# Altium PCB USBgpib-V3-USBTMC.PcbDoc
Units mm, origin at the board's own origin, x right, y up, seen from the top; angles counter-clockwise.
Board outline 54.72 x 15.3 mm, 4 copper layers (Top Layer, Layer 1, Layer 2, Bottom Layer), stack 1.584 mm thick; 33 components, 37 nets, 161 pads, 76 vias.
Unrouted connection lines stored in the file: 2.
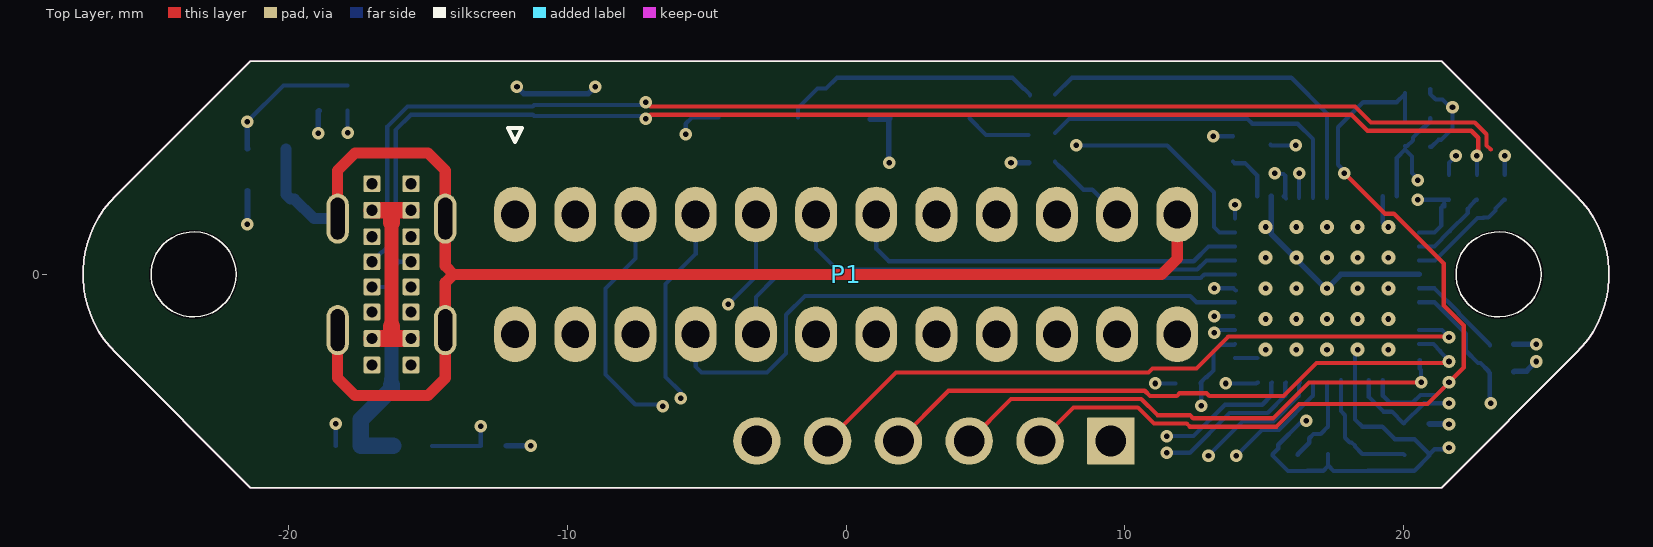
[diagram p0: Top Layer view]
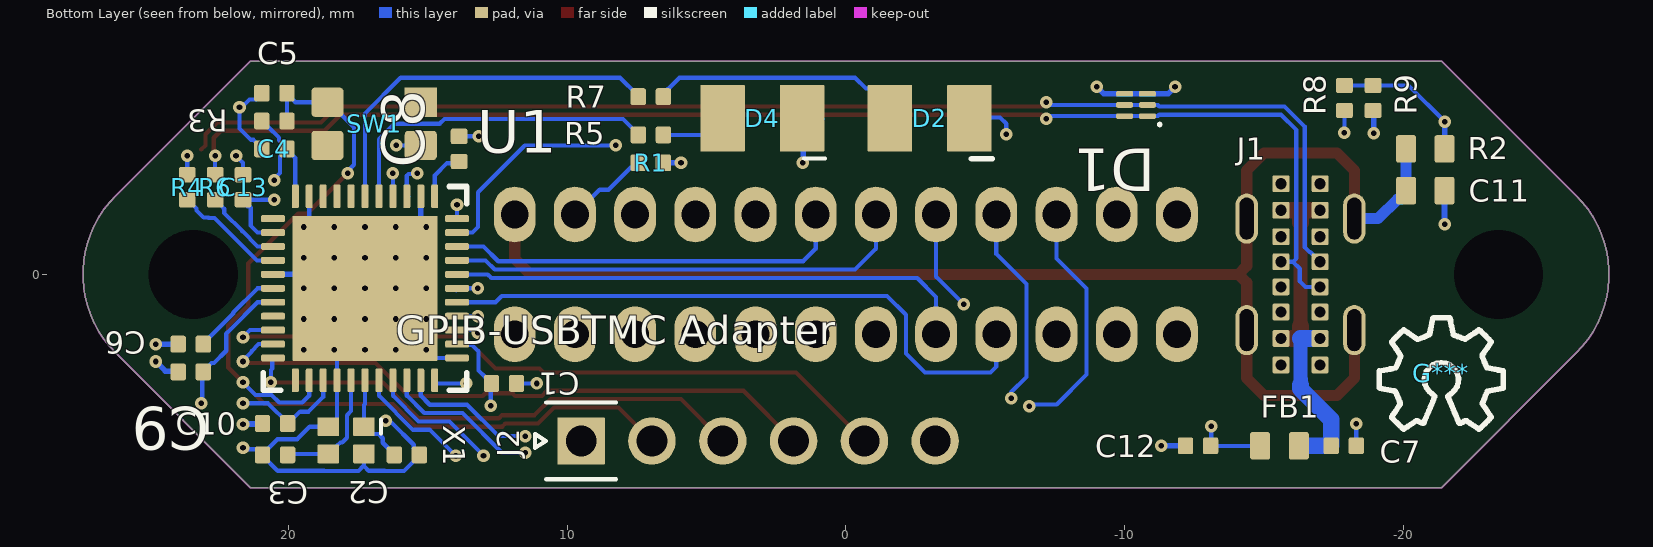
[diagram p1: Bottom Layer view, seen from below]
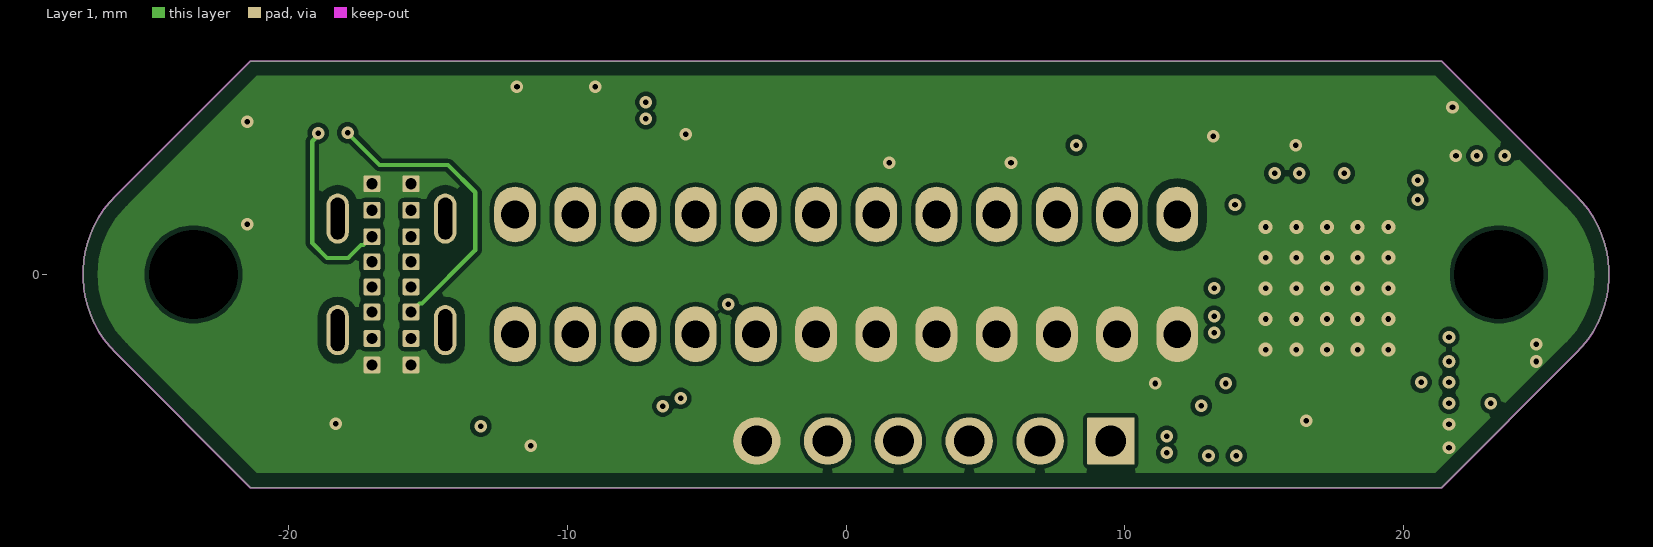
[diagram p2: Layer 1]
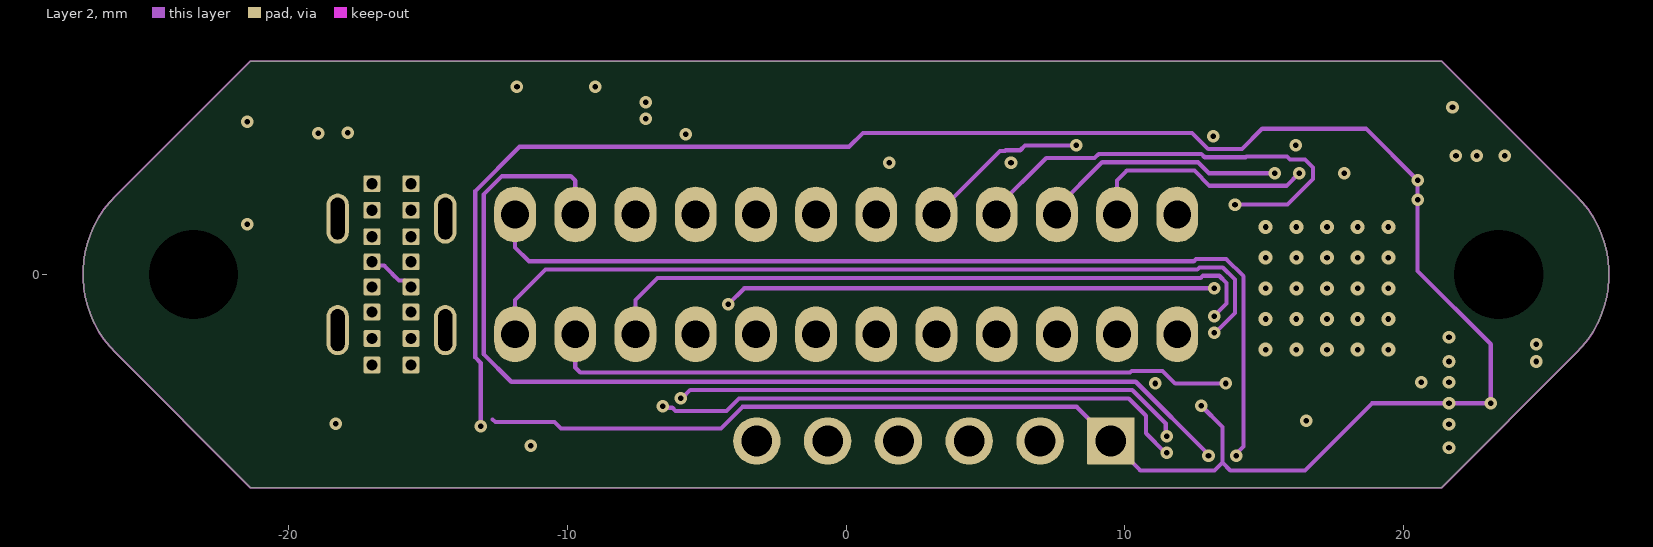
[diagram p3: Layer 2]
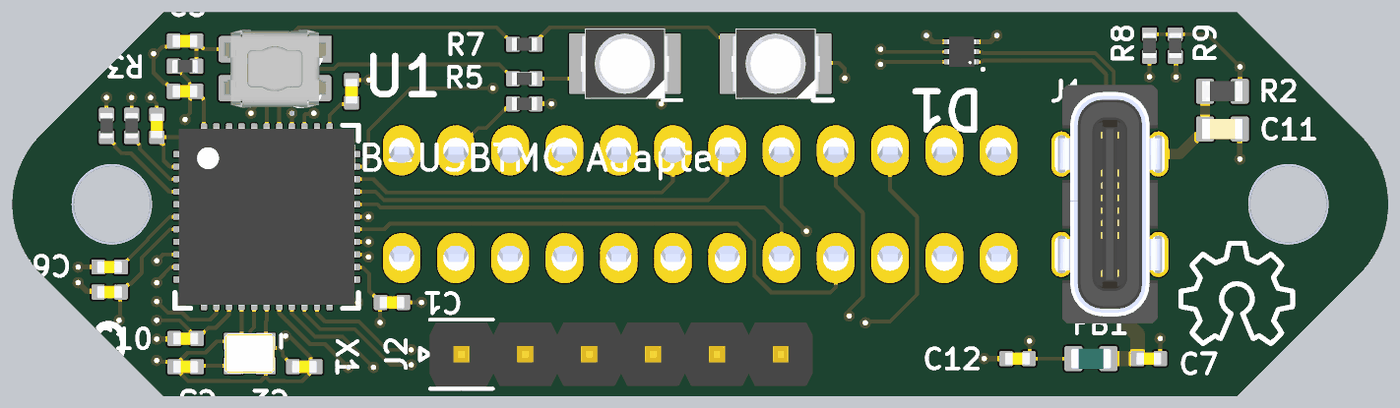
[diagram p4: 3D render of the assembled board from below, using the file's embedded part models]

## Layer stack, top to bottom
Top Solder: solder mask 0.0102, Solder Resist, Dk 3.5
Top Layer: signal copper 0.0356
Dielectric 2: prepreg 0.0711, PP-006, Dk 4.1
Layer 1: signal copper 0.035
Dielectric 1: dielectric 1.3, FR-4, Dk 4.8
Layer 2: signal copper 0.0356
Dielectric 3: prepreg 0.0711, PP-006, Dk 4.1
Bottom Layer: signal copper 0.0356
Bottom Solder: solder mask 0.0102, Solder Resist, Dk 3.5

## Board outline
-21.357,-7.65 -26.178,-2.828 cw(c-23.4,0) -26.178,2.828 -21.357,7.65 21.357,7.65 26.178,2.828 cw(c23.4,0) 26.178,-2.828 21.357,-7.65

## Design rules (kind name [scope] priority, off if disabled: settings)
Clearance Clearance_2 [InNet('SHIELD')] p1: gap=0.25 ignorepadtopadclearanceinfootprint=FALSE
Clearance Clearance_1 [All vs IsKeepOut] p2: gap=0.5 ignorepadtopadclearanceinfootprint=FALSE
Clearance [All] p3: gap=0.15 ignorepadtopadclearanceinfootprint=FALSE
HoleSize [All] p1: absolutevalues=TRUE maxlimit=10 minlimit=0.025 maxpercent=80.000 minpercent=20.000
MinimumSolderMaskSliver [All] p1: minsoldermaskwidth=0.075
PolygonConnect [All] p1: connectstyle=Direct reliefconductorwidth=0.254 reliefentries=4 polygonreliefangle="90 Angle" airgapwidth=0.254
RoutingVias [All] p1: holewidth=0.2 width=0.45 viastyle="Through Hole" minholewidth=0.2 minwidth=0.45 maxholewidth=0.5 maxwidth=1
SilkToSilkClearance [All] p1: silktosilkclearance=0.15
SilkToSolderMaskClearance [IsPad] p1: minsilkscreentomaskgap=0.1 clearancetoexposedcopper=TRUE
SolderMaskExpansion [All] p1: expansion=0.102 istentingtop=FALSE
SupplyNets "Schematic Supply Nets_4" [InNet('5VP')] p1: voltage=0.000
SupplyNets "Schematic Supply Nets_3" [InNet('SHIELD')] p2: voltage=0.000
SupplyNets "Schematic Supply Nets_2" [InNet('VBUS')] p3: voltage=0.000
SupplyNets "Schematic Supply Nets" [InNet('GND')] p4: voltage=0.000
Width [All] p1: maxlimit=10 minlimit=0.15 preferedwidth=0.15
26 further rules are at their usual default settings.

## Components (designator, comment, footprint, x,y, rotation, side; value= is the part's Value field where it differs from the comment)
C1 "CAP0402" CAPC0402 12.264,-3.912 r180 bottom
C2 "CAP0603" CAPC0402 15.75,-6.475 r180 bottom
C3 "CAP0603" CAPC0402 20.475,-6.475 r0 bottom
C4 "CAP0402" CAPC0402 20.5,4.5 r0 bottom locked
C5 "CAP0402" CAPC0402 20.5,6.5 r0 bottom locked
C6 "CAP0402" CAPC0402 23.5,-2.5 r0 bottom locked
C7 "CAP0402" CAPC0402 -17.85,-6.15 r180 bottom
C8 "CAP0402" CAPC0402 13.875,4.5 r90 bottom locked
C9 "CAP0402" CAPC0402 23.5,-3.5 r0 bottom locked
C10 "CAP0402" CAPC0402 20.475,-5.35 r0 bottom
C11 "CAP0603" CAPC0603 -20.775,3 r180 bottom
C12 "CAP0402" CAPC0402 -12.625,-6.15 r0 bottom
C13 "CAP0402" CAPC0402 21.625,3.125 r90 bottom locked
D1 "CDDFN6-3312P" SON40P100X50-6L -10.4,6.075 r0 bottom
D2 "LED-PLCC2-GREEN" LED-PLCC2-GREEN -3,5.6 r0 bottom locked
D4 "LED-PLCC2-BLUE" LED-PLCC2-BLUE 3,5.6 r0 bottom locked
FB1 "FB0603" FB0603 -15.55,-6.15 r0 bottom value=1KZ
G*** "Comment" LOGO -21.35,-3.55 r180 bottom value=LOGO
J1 "CONN-USBC-USB2-VERT" CONN-CUI-UJ20-C-V-C-3-SMT-TR -16.3,0 r90 bottom locked
J2 "CONN-HEADER-PIN-1X6" HEADER-1X6 3.15,-5.975 r180 bottom
P1 "CONN-NORCOMP-111-024-113R00" CONN-NORCOMP-111-024-113L001 0.006,0 r180 top locked
R1 "RESC0402" RESC0402 7,4 r180 bottom locked value=100K
R2 "RESC0603" RESC0603 -20.775,4.5 r180 bottom value=4K7
R3 "RESC0402" RESC0402 20.5,5.5 r180 bottom locked value=10K
R4 "RESC0402" RESC0402 23.625,3.125 r270 bottom locked value=27R
R5 "RESC0402" RESC0402 7,5 r180 bottom locked value=1K
R6 "RESC0402" RESC0402 22.625,3.125 r270 bottom locked value=27R
R7 "RESC0402" RESC0402 7,6.375 r180 bottom locked value=1K
R8 "RESC0402" RESC0402 -17.875,6.325 r90 bottom value=5K1
R9 "RESC0402" RESC0402 -18.9,6.325 r90 bottom value=5K1
SW1 "SWITCH-PANASONIC-EVP-AA202K" SWITCH-PANASONIC-EVP-AA202K 16.925,5.4 r0 bottom locked
U1 "ATMEGA32U4QFN" QFN50P700X700X-44-TH520X520 17.25,-0.5 r180 bottom locked
X1 "16MHz" XOSC-YXC-2016 17.925,-5.95 r0 bottom

## Footprints (in the part's own frame and the unit in brackets; to place one, negate y for a bottom-side part, rotate by r counter-clockwise, add the part's x,y. Pads: shape width x height; smd on the part's side, far side on the other; paste and mask are expansions set on the pad)
CAPC0402 [mm] "CAPACITOR, CHIP 0402 (1005) 0.5MM THICK"
  rrect25% 0.55x0.6 smd paste+0 mask+0.075: 1(-0.45,0) 2(0.45,0)
  body extent -0.51,-0.25 0.51,0.26, height 0.52
CAPC0603 [mm] "CAPACITOR, CHIP 0603 (1608) 0.5MM THICK"
  rrect25% 0.72x0.99 smd paste+0 mask+0.075: 1(-0.69,0) 2(0.69,0)
  body extent -0.81,-0.41 0.81,0.41, height 0.51
CONN-CUI-UJ20-C-V-C-3-SMT-TR [mm]
  oval 1.8x0.8 hole 0.5 slot 1.5 at 0 deg paste-2539.97 mask+0.05: 1(-2,1.93) 2(2,1.93) 3(2,-1.93) 4(-2,-1.93)
  rrect16% 0.6x0.6 hole 0.4 paste-2539.97 mask+0.05: A1(-3.25,0.7) A4(-2.3,0.7) A5(-1.35,0.7) A6(-0.45,0.7) A7(0.45,0.7) A8(1.35,0.7) A9(2.3,0.7) A12(3.25,0.7) B1(3.25,-0.7) B4(2.3,-0.7) B5(1.35,-0.7) B6(0.45,-0.7) B7(-0.45,-0.7) B8(-1.35,-0.7) B9(-2.3,-0.7) B12(-3.25,-0.7)
  body extent -4.75,-2.08 4.75,2.08, height 10.5
CONN-NORCOMP-111-024-113L001 [mm] "GPIB MALE VERT"
  oval 1.5x2 hole 1 paste-2539.97 mask+0.05: 1(11.874,-2.146) 2(9.716,-2.146) 3(7.556,-2.146) 4(5.397,-2.146) 5(3.239,-2.146) 6(1.08,-2.146) 7(-1.079,-2.146) 8(-3.238,-2.146) 9(-5.397,-2.146) 10(-7.556,-2.146) 11(-9.716,-2.146) 12(-11.874,-2.146) 13(11.874,2.146) 14(9.716,2.146) 15(7.556,2.146) 16(5.397,2.146) 17(3.238,2.146) 18(1.079,2.146) 19(-1.08,2.146) 20(-3.239,2.146) 21(-5.397,2.146) 22(-7.556,2.146) 23(-9.716,2.146) 24(-11.874,2.146)
  round 0 hole 3.2 unplated paste-2539.97 mask+0.15: ME1(23.406,0) ME2(-23.406,0)
  silkscreen extent 11.63,-5.25 12.12,-4.75, body extent -27.32,-7.65 27.33,7.65, height 14.81
FB0603 [mm] "FERRITE BEAD 0603 (1608)"
  rrect25% 0.72x0.99 smd mask+0.075: 1(-0.69,0) 2(0.7,0)
  body extent -0.8,-0.4 0.8,0.4, height 0.95
HEADER-1X6 [mm]
  rrect5% 1.7x1.7 hole 1.1 mask+0.05: 1(-6.35,0)
  round 1.7 hole 1.1 mask+0.05: 2(-3.81,0) 3(-1.27,0) 4(1.27,0) 5(3.81,0) 6(6.35,0)
  silkscreen extent -8,-1.38 -5.1,1.38, body extent -7.62,-1.27 7.62,1.27, height 8.55
LED-PLCC2-BLUE [mm] "SMD Mono-color TOP LED, body 3.2x2.8mm"
  rrect6% 1.6x2.4 smd mask+0.05: 1(-1.425,0) 2(1.425,0)
  silkscreen extent -2.25,1.45 -1.5,1.45, body extent -1.75,-1.4 1.75,1.4, height 1.9
LED-PLCC2-GREEN [mm] "SMD Mono-color TOP LED, body 3.2x2.8mm"
  rrect6% 1.6x2.4 smd mask+0.05: 1(-1.425,0) 2(1.425,0)
  silkscreen extent -2.25,1.45 -1.5,1.45, body extent -1.75,-1.4 1.75,1.4, height 1.9
LOGO [mm]
  silkscreen extent -2.23,-2 2.23,2
QFN50P700X700X-44-TH520X520 [mm] "QFN, 44-Leads, Body 7.00x7.00mm, Pitch 0.50mm, Thermal Pad 5.20x5.20mm, IPC High Density"
  rrect40% 0.85x0.25 smd mask+0.05: 1(-3.3,2.5) 2(-3.3,2) 3(-3.3,1.5) 4(-3.3,1) 5(-3.3,0.5) 6(-3.3,0) 7(-3.3,-0.5) 8(-3.3,-1) 9(-3.3,-1.5) 10(-3.3,-2) 11(-3.3,-2.5) 23(3.3,-2.5) 24(3.3,-2) 25(3.3,-1.5) 26(3.3,-1) 27(3.3,-0.5) 28(3.3,0) 29(3.3,0.5) 30(3.3,1) 31(3.3,1.5) 32(3.3,2) 33(3.3,2.5)
  rrect40% 0.25x0.85 smd mask+0.05: 12(-2.5,-3.3) 13(-2,-3.3) 14(-1.5,-3.3) 15(-1,-3.3) 16(-0.5,-3.3) 17(0,-3.3) 18(0.5,-3.3) 19(1,-3.3) 20(1.5,-3.3) 21(2,-3.3) 22(2.5,-3.3) 34(2.5,3.3) 35(2,3.3) 36(1.5,3.3) 37(1,3.3) 38(0.5,3.3) 39(0,3.3) 40(-0.5,3.3) 41(-1,3.3) 42(-1.5,3.3) 43(-2,3.3) 44(-2.5,3.3)
  rrect1% 5.2x5.2 smd mask+0.05: 45(0,0)
  silkscreen extent -3.65,-3.65 3.65,3.65, body extent -3.52,-3.52 3.52,3.52, height 1
RESC0402 [mm] "RESISTOR, CHIP 0402 (1005)"
  rrect25% 0.55x0.6 smd paste+0 mask+0.075: 1(-0.45,0) 2(0.45,0)
  body extent -0.5,-0.25 0.5,0.25, height 0.27
RESC0603 [mm] "RESISTOR, CHIP 0603 (1608)"
  rrect25% 0.72x0.99 smd paste+0 mask+0.075: 1(-0.69,0) 2(0.69,0)
  body extent -0.8,-0.4 0.8,0.4, height 0.37
SON40P100X50-6L [mm] "SON, 6-Leads, Body 1.20x1.00mm, Pitch 0.40mm, IPC High Density"
  rrect50% 0.6x0.2 smd mask+0.05: 1(-0.41,0.4) 2(-0.41,0) 3(-0.41,-0.4) 4(0.41,-0.4) 5(0.41,0) 6(0.41,0.4)
  silkscreen extent -0.9,0.65 -0.8,0.75, body extent -0.55,-0.6 0.55,0.6, height 0.5
SWITCH-PANASONIC-EVP-AA202K [mm] "SWITCH-PANASONIC-EVP-AA202K"
  rect 1.15x1.05 smd mask+0.075: 1(-1.675,-0.775)
  rrect25% 1.15x1.05 smd mask+0.075: 2(1.675,-0.775) 3(1.675,0.775) 4(-1.675,0.775)
  body extent -2.15,-1.55 2.15,1.55, height 1.71
XOSC-YXC-2016 [mm] "YSO110TR"
  rrect10% 0.775x0.675 smd paste+0 mask+0.05: 1(-0.637,-0.487) 2(0.637,-0.487) 3(0.637,0.488) 4(-0.637,0.487)
  silkscreen extent -1.25,-0.75 -1.25,-0.24, body extent -1,-0.8 1,0.8, height 0.76

## Part data
C1 C4 C5 C10: library part CAPC-0402-100nF-16V-X7R, "CAPACITOR,CERAMIC,100nF,16V,X7R,0402", Capacitance=100nF, Dielectric=X7R, LCSC=C60474, Package / Case=0402, Supplier Part Number 1=1292-1630-1-ND, Voltage=16V, Supplier 1=Digikey
C2 C3: library part CAPC-0402-15PF-50V-C0G, "CAPACITOR,CERAMIC,15pF,50V,C0G,0402", Capacitance=15pF, Dielectric=C0G, LCSC=C3906764, Package / Case=0402, Supplier Part Number 1=311-3780-1-ND, Voltage=50V, Supplier 1=Digikey
C6: library part CAPC-0402-1u-10V-X7R, "CAPACITOR,CERAMIC,1uF,10V,X7R,0402", Capacitance=1uF, Dielectric=X7R, LCSC=C528974, Package / Case=0603, Supplier Part Number 1=81-GRM155Z71A105KE1D, Voltage=10V, Supplier 1=Mouser
C7 C8 C9 C12 C13: library part CAPC-0402-4u7-10V-X5R, "CAPACITOR,CERAMIC,4u7,10V,X5R,0402", Capacitance=4u7, Dielectric=X5R, LCSC=C1705, Package / Case=0603, Supplier Part Number 1=1276-1482-1-ND, Voltage=10V, Supplier 1=Digikey
C11: library part CAPC-0603-1nF-250V-X7R, "CAPACITOR,CERAMIC,1nF,250V,X7R,0603", Capacitance=1nF, Dielectric=X7R, LCSC=C277510, Package / Case=0603, Supplier Part Number 1=311-4104-1-ND, Voltage=250V, Supplier 1=Digikey
D1: library part TVS-BOURNS-CDDFN6-3312P, LCSC=C3700524
FB1: library part FB0603-1KZ-0R2, LCSC=C160982, Supplier Part Number 1=BLM18KG102SN1D, Supplier 1="Arrow Electronics"
G***: library part LOGO, "OSHW LOGO"
J1: "USB-C, VERTICAL"
P1: "GPIB MALE", Supplier Part Number 1=1024RMA-ND, Supplier 1=Digikey
R1: library part RESC-0402-100K-1%-1/10W, "RESISTOR,100K,1%,63mW,0402 (1005)", LCSC=C60491, Power=1/16W, Supplier Part Number 1=3068008, Tolerance=1%, Supplier 1="Future Electronics"
R2: library part RESC-0603-4K7-1%-1/10W, "RESISTOR,4K7,1%,100mW,0603 (1608)", Power=1/10W, Supplier Part Number 1=5489695, Tolerance=1%, Supplier 1="Future Electronics", Supplier 2=Digikey, Supplier 3=Digikey, Supplier 4=Avnet, Supplier Part Number 2=P4.70KHCT-ND, Supplier Part Number 3=RMCF0603FT4K70CT-ND, Supplier Part Number 4=1622960-1
R3: library part RESC-0402-10K-1%-1/10W, "RESISTOR,10K,1%,63mW,0402 (1005)", LCSC=C60490, Power=1/16W, Supplier Part Number 1=3388022, Tolerance=1%, Supplier 1="Future Electronics"
R4 R6: library part RESC-0402-27R-1%-1/10W, "RESISTOR,27R,1%,63mW,0402 (1005)", LCSC=C138021, Power=1/16W, Supplier Part Number 1=2577120, Tolerance=1%, Supplier 1="Future Electronics"
R5 R7: library part RESC-0402-1K-1%-1/10W, "RESISTOR,1K,1%,63mW,0402 (1005)", LCSC=C106235, Power=1/16W, Supplier Part Number 1=7825607, Tolerance=1%, Supplier 1="Future Electronics"
R8 R9: library part RESC-0402-5K1-1%-1/10W, "RESISTOR,5K1,1%,63mW,0402 (1005)", LCSC=C105872, Power=1/16W, Supplier Part Number 1=6053649, Tolerance=1%, Supplier 1="Future Electronics"
U1: library part IC-ATMEL-ATMEGA32U4-QFN
X1: library part XTAL-YXC-XL7EL89COI-111YLC-16M, "XTAL,4PIN", LCSC=C2965579, Frequency=16MHz

## Via types
v1: diameter 0.45, hole 0.2, Top Layer to Bottom Layer, tented both sides, 51 vias
v2: diameter 0.5, hole 0.2, Top Layer to Bottom Layer, 25 vias

## Nets (pads, with @x,y where several pads share a name; then routed paths per layer and width w, separated by ;. In a path a pad name is that pad's centre, name@x,y a point inside that pad or via, vN(x,y) a via of type N, cw(c..) or ccw(c..) an arc to the next point about the centre after c; other vN are vias at no path point)
5VP: C1.1 C4.1 C8.1 C9.1 C10.1 C12.1 C13.1 FB1.2 J2.1 R3.1 U1.2 U1.7 U1.14 U1.24 U1.34 U1.44 | length 118.4
  Layer 2 w0.15: v1(-13.1,-5.45) -13.1,-3.18 -13.293,-2.987 -13.293,2.987 -11.705,4.575 0.104,4.575 0.604,5.075 12.414,5.075 12.989,4.5 14.204,4.5 14.929,5.225 18.65,5.225 v1(20.5,3.375) v1(20.5,2.675) 20.5,0.119 23.125,-2.506 v1(23.125,-4.625) v1(21.625,-4.625) 18.865,-4.625 16.459,-7.03 13.78,-7.03 13.5,-6.75 ; -12.675,-5.2 -12.575,-5.3 -10.45,-5.3 -10.225,-5.525 -4.482,-5.525 -3.707,-4.75 8.275,-4.75 10.555,-7.03 13.22,-7.03 13.5,-6.75 ; v1(12.739,-4.713) 13.5,-5.474 13.5,-6.75
  Bottom Layer w0.15: FB1.2 -13.1,-6.15 v1(-13.1,-5.45) ; C1.1 12.714,-3.888 12.914,-3.688 12.939,-3.688 13.176,-3.45 13.176,-2.76 13.41,-2.526 13.924,-2.526 U1.24 ; v1@12.739,-4.7 C1.1@12.739,-3.9 ; C8.1 13.937,3.988 14.312,3.988 14.75,3.55 U1.34 ; U1.14 18.75,-4.401 19.274,-4.925 19.574,-4.925 19.999,-5.351 20.725,-4.625 v1(21.625,-4.625) ; U1.44 19.75,4.175 C4.1@20.05,4.475 ; C4.1 C4.1@20.05,4.475 ; C4.1@20.05,4.6 20.125,4.6 20.332,4.807 20.332,4.902 20.706,5.275 20.75,5.275 20.95,5.475 R3.1@20.95,5.6 ; v1(20.5,2.675) C13.1 ; v1(20.5,3.375) 20.5,3.438 20.3,3.638 20.3,4.225 C4.1@20.05,4.475 ; U1.7 21.101,-1 22.075,-1.974 22.075,-1.976 22.225,-2.126 22.225,-2.74 22.66,-3.175 22.75,-3.175 23.05,-3.475 C9.1 23.088,-3.537 23.088,-4.587 v1(23.125,-4.625) ; U1.2 21.101,1.5 21.35,1.749 21.35,2.387 21.4,2.437 21.4,2.475 C13.1@21.456,2.531 ; C13.1@21.469,2.437 21.469,2.475 C13.1@21.469,2.519
ATN: P1.11 R1.1 U1.37 | length 12.2
  Layer 2 w0.15: P1.11 9.722,3.371 10.072,3.721 12.495,3.721 13.041,3.175 15.8,3.175 v1(16.25,3.625)
  Bottom Layer w0.15: R1.1@7.5,4.05 7.5,4.025 7.7,3.825 7.725,3.825 8.515,3.035 8.833,3.035 P1.11 ; U1.37@16.25,2.75 v1(16.25,3.625)
DAV: P1.6 U1.30 | length 16.7
  Bottom Layer w0.15: P1.6 -1.073,0.921 -0.323,0.171 12.595,0.171 12.924,0.5 U1.30
DIO1: P1.1 U1.18 | length 38.5
  Layer 2 w0.15: P1.1 -11.868,0.968 -11.371,0.471 12.471,0.471 12.55,0.55 13.635,0.55 14.25,-0.065 14.25,-6.169 14,-6.419 v1(14,-6.5)
  Bottom Layer w0.15: v1(14,-6.5) 14.925,-5.575 15.526,-5.575 16.75,-4.351 16.75,-3.9 U1.18@16.775,-3.875
DIO2: P1.2 U1.19 | length 42.7
  Layer 2 w0.15: P1.2 -9.709,3.359 -9.871,3.521 -12.334,3.521 -12.993,2.862 -12.993,-2.862 -12.006,-3.85 10.39,-3.85 13,-6.46 v1(13,-6.5)
  Bottom Layer w0.15: v1(13,-6.5) 14.225,-5.275 15.326,-5.275 16.25,-4.351 16.25,-3.9 U1.19@16.274,-3.876
DIO3: P1.3 U1.20 | length 33.8
  Layer 2 w0.15: v1(-6.566,-4.725) -6.509,-4.782 -6.229,-4.782 -6.111,-4.9 -4.282,-4.9 -3.832,-4.45 10.142,-4.45 10.763,-5.071 10.763,-5.699 11.464,-6.4 v1(11.5,-6.4)
  Bottom Layer w0.15: P1.3 -7.55,0.575 -8.63,-0.505 -8.63,-3.595 -7.557,-4.668 -6.624,-4.668 v1(-6.566,-4.725) ; v1(11.5,-6.4) 12.328,-6.4 13.753,-4.975 15.126,-4.975 15.75,-4.351 15.75,-3.9 U1.20@15.775,-3.875
DIO4: P1.4 U1.21 | length 30.6
  Layer 2 w0.15: v1(-5.925,-4.45) -5.889,-4.45 -5.589,-4.15 10.266,-4.15 11.466,-5.35 11.466,-5.766 v1(11.5,-5.8)
  Bottom Layer w0.15: v1(-5.925,-4.45) -5.925,-4.225 -6.471,-3.679 -6.471,-0.346 -5.391,0.734 P1.4 ; v1(11.5,-5.8) 12.464,-5.8 13.589,-4.675 14.926,-4.675 15.25,-4.351 15.25,-3.9 U1.21@15.275,-3.875
DIO5: P1.13 U1.25 | length 30.7
  Layer 2 w0.15: P1.13 -11.868,-0.921 -10.776,0.171 12.595,0.171 12.674,0.25 13.511,0.25 13.95,-0.189 13.95,-1.386 13.236,-2.1 v1(13.2,-2.1)
  Bottom Layer w0.15: v1(13.2,-2.1) 13.281,-2.1 13.381,-2 U1.25
DIO6: P1.14 U1.22 | length 26
  Layer 2 w0.15: P1.14 -9.709,-3.341 -9.529,-3.521 10.188,-3.521 10.246,-3.463 11.356,-3.463 11.806,-3.912 v1(13.625,-3.912)
  Bottom Layer w0.15: v1(13.625,-3.912) 14.712,-3.912 14.75,-3.875 U1.22@14.775,-3.875
DIO7: P1.15 U1.26 | length 25
  Layer 2 w0.15: P1.15 -7.55,-0.921 -6.758,-0.129 12.719,-0.129 12.798,-0.05 13.386,-0.05 13.65,-0.314 13.65,-1.05 v1(13.2,-1.5)
  Bottom Layer w0.15: v1(13.2,-1.5) U1.26@13.9,-1.5
DIO8: P1.16 U1.27 | length 22.6
  Bottom Layer w0.15: P1.16 -5.391,-3.309 -5.179,-3.521 -2.831,-3.521 -2.153,-2.843 -2.153,-1.449 -1.475,-0.771 12.347,-0.771 12.575,-1 U1.27
DN: R6.2 U1.3 | length 2.9
  Bottom Layer w0.15: U1.3 21.101,1 21.65,1.549 22.3,2.199 22.3,2.35 ; 22.3,2.285 22.3,2.35 ; R6.2 22.6,2.675 22.4,2.475 22.4,2.45 22.3,2.35
DP: R4.2 U1.4 | length 4
  Bottom Layer w0.15: U1.4 21.119,0.5 22.644,2.025 22.871,2.025 ; 22.861,2.036 23.036,2.036 23.289,2.289 23.289,2.364 23.4,2.475 23.6,2.675 R4.2
EOI: P1.5 U1.28 | length 22.1
  Layer 2 w0.15: v1(-4.225,-1.075) -3.65,-0.5 v1(13.2,-0.5)
  Bottom Layer w0.15: v1(-4.225,-1.075) -3.232,-0.082 P1.5 ; v1(13.2,-0.5) 13.9,-0.5 U1.28@13.975,-0.575
GND: C1.2 C2.2 C3.2 C4.2 C5.2 C6.2 C7.2 C8.2 C9.2 C10.2 C11.2 C12.2 C13.2 D1.3 D1.4 D2.1 D4.1 J1.A1 J1.A12 J1.B1 J1.B12 J2.6 P1.18 P1.19 P1.20 P1.21 P1.22 P1.23 P1.24 R1.2 R2.2 R8.2 R9.2 SW1.4 U1.5 U1.15 U1.23 U1.35 U1.43 U1.45 X1.2 X1.4 | length 49
  Bottom Layer w0.15: v1(-21.475,5.475) -20.175,6.775 R8.2 ; C7.2 v1(-18.3,-5.35) ; v1(-5.75,5.025) -5.75,5.4 -5.525,5.625 D2.1@-4.575,5.625 ; v1(11.089,-3.912) C1.2 ; v1(13.175,4.95) C8.2 ; U1.23 U1.45@14.75,-3 ; SW1.4@15.225,4.65 SW1.4 v1(16.125,4.625) ; C2.2 15.3,-6.5 15.85,-7.05 16.549,-7.05 16.555,-7.044 17.118,-7.044 17.288,-6.874 X1.4 ; C2.2@15.3,-6.45 15.5,-6.25 15.5,-6.11 16.303,-5.307 16.443,-5.307 v1(16.5,-5.25) ; U1.45@17.275,-0.575 U1.45@17.3,-0.55 ; 17.3,-6.862 17.488,-7.05 18.716,-7.05 ; U1.45@18.375,-2.775 18.25,-2.9 U1.15 18.25,-5.113 18.25,-5.2 18.512,-5.463 19.232,-5.463 19.682,-5.913 20.387,-5.913 20.925,-6.45 20.925,-6.5 20.381,-7.044 18.716,-7.044 ; U1.43 19.25,1.85 U1.45@19.475,1.625 ; C3.2@20.9,-6.475 21.103,-6.272 21.578,-6.272 v1(21.625,-6.225) ; C4.2@20.95,4.575 21,4.575 21.25,4.825 21.34,4.825 21.75,5.235 v1(21.75,6) 21.669,6 21.394,6.275 21.15,6.275 20.95,6.475 C5.2@20.95,6.65 ; C13.2 21.625,4 v1(21.875,4.25)
  Bottom Layer w0.2: v1(-21.475,1.8) -21.465,1.81 C11.2 ; v1(-21.475,5.475) -21.475,4.51 R2.2 ; C12.2 v1(-11.3,-6.15) ; v1(-11.8,6.725) -11.55,6.475 D1.3 D1.4 -9.25,6.475 v1(-9,6.725) ; D4.1@0.875,5.558 1.533,5.558 D4.1 1.54,5.565 1.54,4.01 v1(1.55,4) ; v1(5.918,4) R1.2 ; U1.35 15.25,1.45 U1.45@17.275,-0.575 ; v2(17.25,-0.5) 17.75,0 U1.5 ; C10.2 20.94,-5.365 21.615,-5.365 v1(21.625,-5.375) ; C9.2 23.983,-3.467 24.408,-3.467 v1(24.75,-3.125) ; C6.2 v1(24.75,-2.5)
  other v2: 15.05,-2.7 16.15,-2.7 17.25,-2.7 18.35,-2.7 19.45,-2.7 15.05,-1.6 16.15,-1.6 17.25,-1.6 18.35,-1.6 19.45,-1.6 15.05,-0.5 16.15,-0.5 18.35,-0.5 19.45,-0.5 15.05,0.6 16.15,0.6 17.25,0.6 18.35,0.6 19.45,0.6 15.05,1.7 16.15,1.7 17.25,1.7 18.35,1.7 19.45,1.7
IFC: P1.9 U1.33 | length 16.7
  Layer 2 w0.15: P1.9 5.404,2.396 7.182,4.175 8.917,4.175 9.063,4.321 12.743,4.321 12.864,4.2 14.329,4.2 14.354,4.225 15.818,4.225 15.918,4.125 16.457,4.125 16.75,3.832 16.75,3.418 15.832,2.5 v1(13.95,2.5)
  Bottom Layer w0.15: U1.33 v1(13.95,2.5)
LBL: R5.1 U1.38 | length 11.9
  Bottom Layer w0.15: R5.1@7.5,5.075 8,5.575 14.396,5.575 14.571,5.4 16.199,5.4 16.75,4.849 U1.38@16.75,2.75
LGN: R7.1 U1.39 | length 13.5
  Bottom Layer w0.15: R7.1@7.5,6.45 8.1,7.05 15.97,7.05 17.25,5.77 U1.39@17.25,2.75
MISO: J2.3 U1.11 | length 18.5
  Top Layer w0.15: J2.3 5.921,-4.474 10.59,-4.474 11.166,-5.05 12.342,-5.05 12.455,-5.162 15.315,-5.162 16.602,-3.875 v1(20.625,-3.875)
  Bottom Layer w0.15: U1.11@20.575,-3.075 20.575,-3.375 20.625,-3.425 v1(20.625,-3.875)
MOSI: J2.4 U1.10 | length 22.5
  Top Layer w0.15: J2.4 3.681,-4.174 10.714,-4.174 10.903,-4.362 11.864,-4.362 11.964,-4.263 12.925,-4.263 13.025,-4.362 15.69,-4.362 16.878,-3.175 21.575,-3.175 v1(21.625,-3.125)
  Bottom Layer w0.15: U1.10 21.064,-2.5 21.324,-2.76 21.324,-2.78 21.625,-3.082 v1(21.625,-3.125)
NDAC: P1.8 U1.32 | length 13.8
  Layer 2 w0.15: P1.8 5.523,4.425 5.706,4.425 5.731,4.45 6.249,4.45 6.424,4.625 v1(8.25,4.625)
  Bottom Layer w0.15: v1(8.25,4.625) 9.225,4.625 11.52,4.625 13.202,2.944 13.202,1.697 13.399,1.5 U1.32
NetD2_2: D2.2 R7.2 | length 9.5
  Bottom Layer w0.15: D2.2@-1.725,5.625 -1.725,5.962 -1.025,6.662 D2.2@-0.896,6.662 ; -0.767,6.662 D2.2@-0.896,6.662 ; R7.2@6.6,6.425 6.6,6.45 6.4,6.65 6.375,6.65 5.975,7.05 -0.324,7.05 -0.712,6.662 D2.2@-0.896,6.662
NetD4_2: D4.2 R5.2 | length 2.4
  Bottom Layer w0.15: D4.2 5.025,5 R5.2
NetJ1_A5: J1.A5 R8.1 | length 11.6
  Layer 1 w0.15: v1(-17.875,5.075) -16.725,3.925 -14.275,3.925 -13.295,2.945 -13.295,0.868 -15.207,-1.045 -15.295,-1.045 J1.A5
  Bottom Layer w0.15: v1(-17.875,5.075) R8.1
NetJ1_B5: J1.B5 R9.1 | length 7.5
  Layer 1 w0.15: v1(-18.93,5.067) -18.93,4.986 -19.141,4.776 -19.141,1.123 -18.607,0.589 -17.853,0.589 -17.394,1.048 -17.302,1.048 J1.B5
  Bottom Layer w0.2: v1(-18.93,5.067) -18.93,5.845 R9.1
NRFD: P1.7 U1.31 | length 14.5
  Bottom Layer w0.15: P1.7 1.086,0.921 1.536,0.471 12.471,0.471 13,1 U1.31
REN: P1.17 U1.29 | length 18.9
  Bottom Layer w0.15: P1.17 -3.232,-0.807 -2.554,-0.129 12.719,-0.129 12.848,0 U1.29
RESETN: C5.1 J2.2 R3.2 SW1.2 U1.13 | length 34.8
  Top Layer w0.15: J2.2 8.161,-4.774 10.466,-4.774 11.042,-5.35 12.218,-5.35 12.331,-5.462 15.439,-5.462 16.251,-4.65 20.85,-4.65 22.155,-3.345 22.155,-1.839 21.437,-1.121 21.437,0.385 19.647,2.175 19.325,2.175 v1(17.875,3.625)
  Bottom Layer w0.15: v1(17.875,3.625) 17.875,3.706 17.65,3.931 17.65,5.275 18.55,6.175 19.75,6.175 C5.1@20.05,6.475 ; U1.13 19.25,-4.351 19.499,-4.6 20.326,-4.6 20.601,-4.325 21.175,-4.325 v1(21.625,-3.875) ; R3.2 C5.1
SCK: J2.5 U1.9 | length 25
  Top Layer w0.15: J2.5 1.794,-3.521 10.844,-3.521 10.994,-3.371 12.565,-3.371 13.711,-2.225 21.6,-2.225 v1(21.625,-2.25)
  Bottom Layer w0.15: U1.9 21.375,-2 v1(21.625,-2.25)
SHIELD: C11.1 J1.1 J1.2 J1.3 J1.4 P1.12 R2.1 | length 51.5
  Top Layer w0.4: J1.4 -18.23,-3.722 -17.602,-4.35 -14.998,-4.35 -14.37,-3.722 J1.1 -14.37,-0.295 -14.075,0 ; J1.3 -18.23,3.722 -17.602,4.35 -14.998,4.35 -14.37,3.722 J1.2 -14.37,0.295 -14.075,0 ; P1.12 11.881,0.572 11.309,0 0.872,0 -2.447,0 -14.075,0
  Bottom Layer w0.4: R2.1 C11.1 -20.085,2.865 -19.925,2.705 -19.79,2.705 -19.085,2 J1.3
SRQ: P1.10 U1.36 | length 10.2
  Layer 2 w0.15: P1.10 7.563,2.396 9.188,4.021 12.619,4.021 13.015,3.625 v1(15.375,3.625)
  Bottom Layer w0.15: v1(15.375,3.625) 15.4,3.6 15.687,3.6 15.75,3.537 U1.36 ; U1.36@15.7,2.8 U1.36@15.775,2.725
UCAP: C6.1 U1.6 | length 3.4
  Bottom Layer w0.15: U1.6 21.101,-0.5 21.976,-1.374 21.976,-1.401 23.1,-2.525 C6.1@23.1,-2.55
USB_N: D1.1 D1.6 J1.A7 J1.B7 R6.1 | length 47.7
  Top Layer w0.15: v1(-7.175,5.575) -7.169,5.575 -7.021,5.723 -6.064,5.723 -6.061,5.725 -5.689,5.725 -5.686,5.723 18.128,5.723 18.701,5.15 22.425,5.15 22.675,4.9 22.675,4.3 v1(22.625,4.25)
  Bottom Layer w0.15: J1.B7 -16.475,-0.45 -16.275,-0.25 -16.275,0.2 -16.025,0.45 ; J1.A7 -16.025,0.45 ; v1(-7.175,5.575) -7.256,5.575 -7.356,5.675 D1.6 D1.1 -11.185,5.675 -11.235,5.725 -15.6,5.725 -16.15,5.175 -16.15,0.575 -16.025,0.45 ; R6.1 v1(22.625,4.25)
USB_P: D1.2 D1.5 J1.A6 J1.B6 R4.1 | length 48.4
  Top Layer w0.15: v1(-7.175,6.175) -7.169,6.175 -7.016,6.023 -6.188,6.023 -6.186,6.025 -5.564,6.025 -5.562,6.023 18.252,6.023 18.825,5.45 22.549,5.45 22.975,5.024 22.975,4.625 23.125,4.475
  Layer 2 w0.15: J1.B6 -16.863,0.313 -16.563,0.313 -16.275,0.025 ; -16.275,0.024 -16.026,-0.225 -15.825,-0.225 J1.A6
  Bottom Layer w0.15: J1.B6 -16.65,0.8 -16.626,0.8 -16.45,0.976 -16.45,5.299 -15.724,6.025 -11.235,6.025 -11.185,6.075 D1.2 D1.5 -7.356,6.075 -7.256,6.175 v1(-7.175,6.175) ; R4.1 v1(23.625,4.25)
VBUS: C7.1 FB1.1 J1.A4 J1.A9 J1.B4 J1.B9 | length 13.4
  Top Layer w0.5: -16.3,-1.75 -16.3,1.857
  Top Layer w0.549: -16.3,-1.857 -16.3,-1.75
  Top Layer w0.6: J1.B9 -16.3,-2.3 ; J1.B4 -16.125,2.3 ; -16.3,-1.857 -16.3,-2.3 ; -16.3,1.857 -16.3,2.125 -16.125,2.3 ; J1.A4 -16.3,-2.3 ; J1.A9 -16.125,2.3
  Bottom Layer w0.5: -16.3,-3.969 -16.313,-3.956 -16.313,-3.77 -16.3,-3.757 -16.3,-2.3
  Bottom Layer w0.6: J1.B9@-16.75,-2.3 -16.3,-2.3 ; -16.3,-3.969 -16.3,-4.104 -17.4,-5.204 C7.1 FB1.1
XI: C2.1 U1.17 X1.1 | length 3.2
  Bottom Layer w0.15: C2.1 16.2,-6.45 16.612,-6.038 16.612,-5.878 16.765,-5.725 17.026,-5.725 X1.1 17.288,-4.682 17.25,-4.644 17.25,-3.9 U1.17@17.275,-3.875
XO: C3.1 U1.16 X1.3 | length 4.5
  Bottom Layer w0.15: U1.16 17.75,-4.902 17.901,-5.052 17.901,-5.859 18.067,-6.025 18.133,-6.025 18.25,-6.142 18.25,-6.175 18.512,-6.438 19.988,-6.438 C3.1
pads on no net: J1.A8 J1.B8 P1.ME1 P1.ME2 SW1.1 SW1.3 U1.1 U1.8 U1.12 U1.40 U1.41 U1.42

## Polygon pours and split planes (outlines as drawn)
GND on Layer 1 "GND_L02_P002" (solid, remove dead copper, pour order 2): 28.15,-7.65 28.15,7.65 -27.35,7.65 -27.35,-7.65

## Keep-outs
Keep-Out Layer:
  the board outline again, w0.05

## Silkscreen, mask and mechanical layers (free items; w line width, h text height)
Top Overlay:
  circle w0.05: c23.4,0 r1.525
  circle w0.05: c-23.4,0 r1.525
  lines w0.05: -26.178,-2.828 cw(c-23.4,0) -26.178,2.828 -21.357,7.65 21.357,7.65 26.178,2.828 cw(c23.4,0) 26.178,-2.828 21.357,-7.65 -21.357,-7.65 -26.178,-2.828
Bottom Overlay:
  text "GPIB-USBTMC Adapter" at 16.15,-2.5 h1.02

## Text inside footprints (layer, text, board x,y; h text height)
D2: Bottom Assembly "K" at -5.225,6.785 h2 r180
D4: Bottom Assembly "K" at 0.775,6.785 h2 r180
SW1: Bottom Assembly "1" at 14.675,6.7 h1 r180